# Altium PCB PCB_V0.PcbDoc (part 2 of 4)
Units mm, origin at the board's own origin, x right, y up, seen from the top; angles counter-clockwise.
Board outline 107.95 x 48.89 mm, 4 copper layers (Top Layer, Layer 1, Layer 2, Bottom Layer), stack 1.586 mm thick; 377 components, 276 nets, 880 pads, 284 vias.
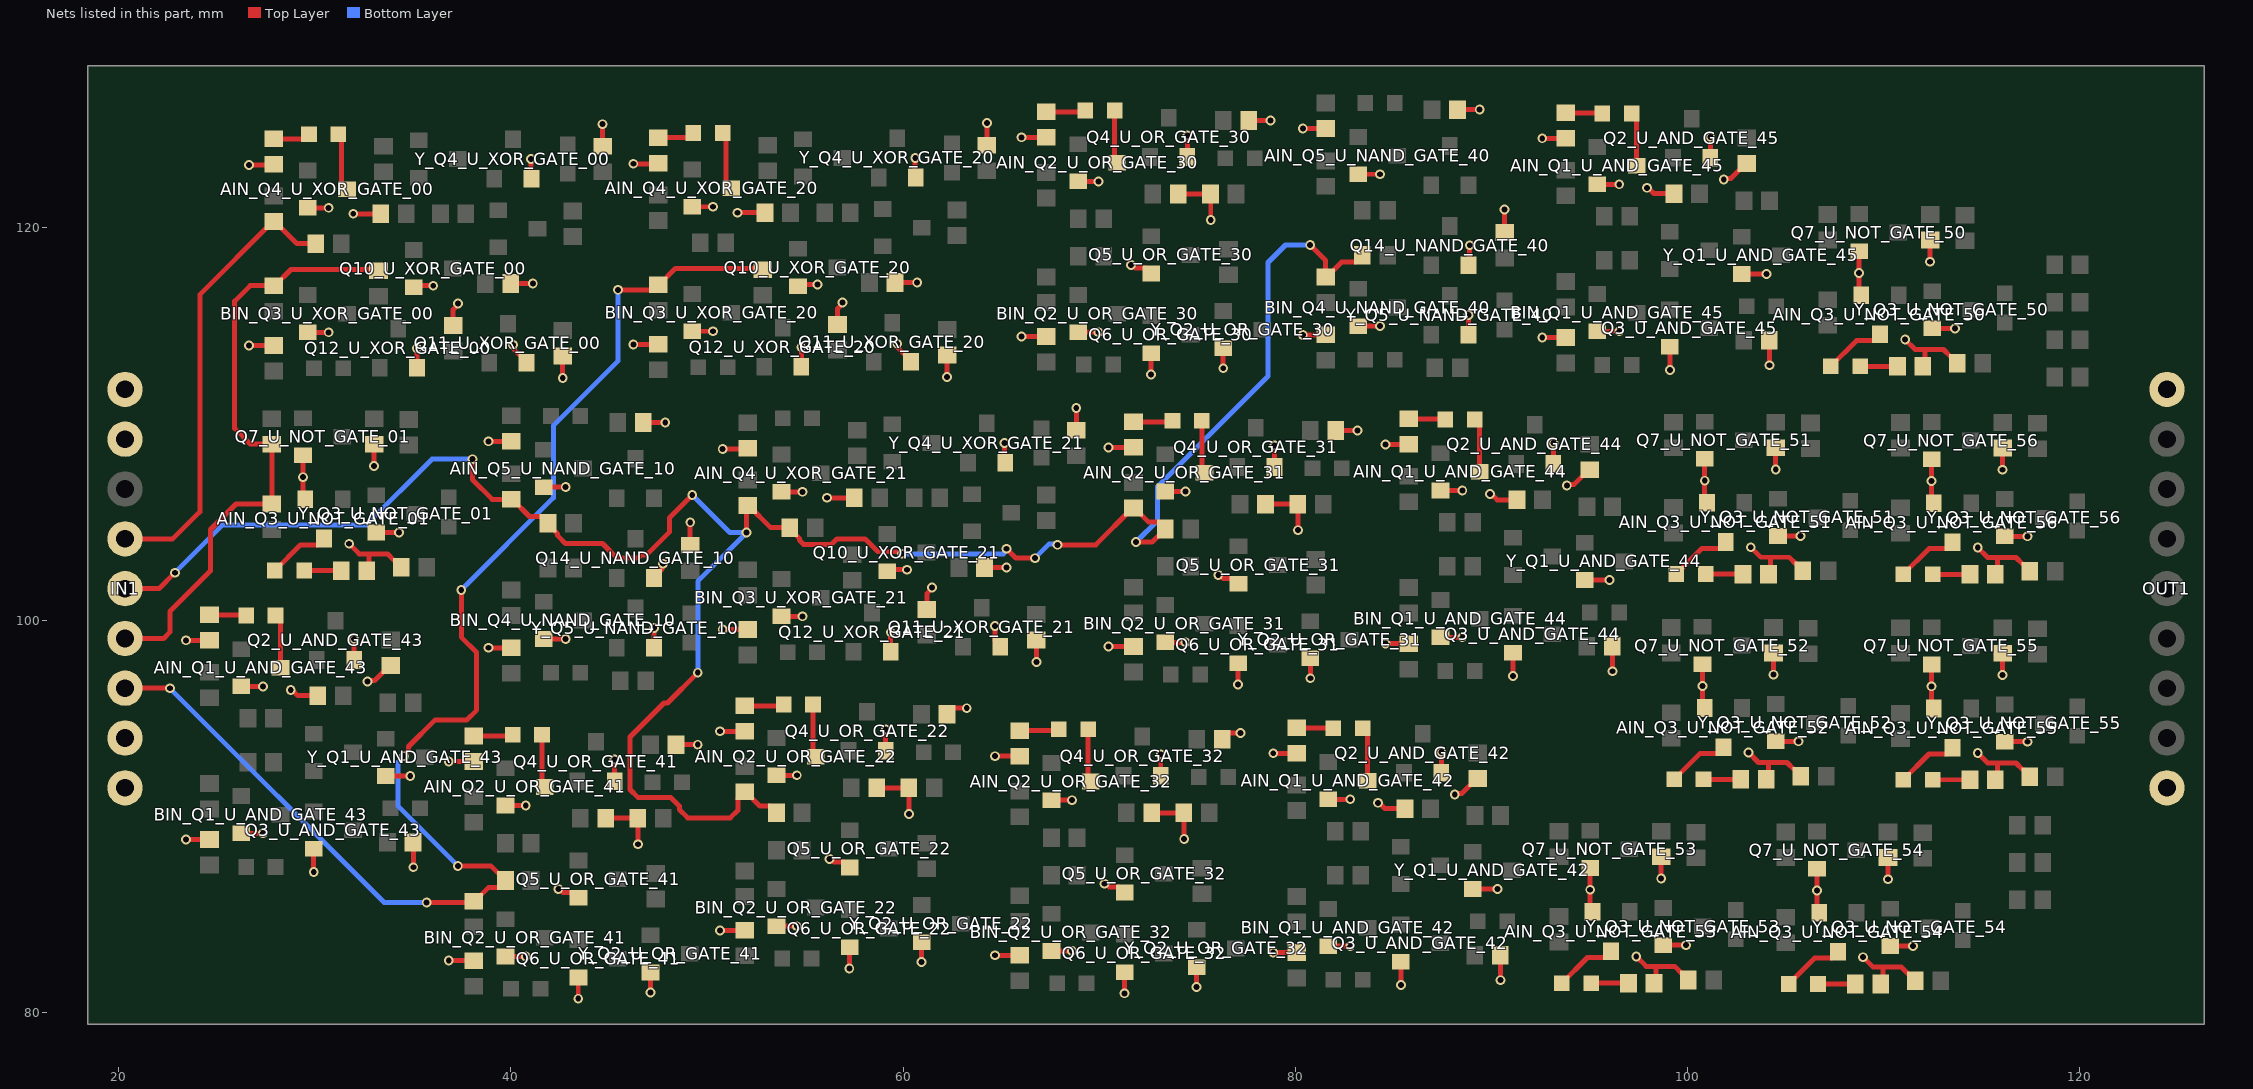
[diagram p4: the nets of this part, all layers, seen from the top]

## Components (designator, comment, footprint, x,y, rotation, side; value= is the part's Value field where it differs from the comment) (continued)
Y_RD3_U_NOT_GATE_01 "330 Ohms" "RES 0603_1608" 35.052,102.682 r0 top (schematic designator Y_RD3)
Y_RD3_U_NOT_GATE_50 "330 Ohms" "RES 0603_1608" 114.412,113.096 r0 top (schematic designator Y_RD3)
Y_RD3_U_NOT_GATE_51 "330 Ohms" "RES 0603_1608" 106.538,102.504 r0 top (schematic designator Y_RD3)
Y_RD3_U_NOT_GATE_52 "330 Ohms" "RES 0603_1608" 106.426,92.035 r0 top (schematic designator Y_RD3)
Y_RD3_U_NOT_GATE_53 "330 Ohms" "RES 0603_1608" 100.696,81.638 r0 top (schematic designator Y_RD3)
Y_RD3_U_NOT_GATE_54 "330 Ohms" "RES 0603_1608" 112.268,81.6 r0 top (schematic designator Y_RD3)
Y_RD3_U_NOT_GATE_55 "330 Ohms" "RES 0603_1608" 118.11,92.014 r0 top (schematic designator Y_RD3)
Y_RD3_U_NOT_GATE_56 "330 Ohms" "RES 0603_1608" 118.11,102.489 r0 top (schematic designator Y_RD3)
Y_RD4_U_XOR_GATE_00 "330 Ohms" "RES 0603_1608" 44.674,123.511 r270 top (schematic designator Y_RD4)
Y_RD4_U_XOR_GATE_20 "330 Ohms" "RES 0603_1608" 64.276,123.566 r270 top (schematic designator Y_RD4)
Y_RD4_U_XOR_GATE_21 "330 Ohms" "RES 0603_1608" 68.834,109.027 r270 top (schematic designator Y_RD4)
Y_RD5_U_NAND_GATE_10 "330 Ohms" "RES 0603_1608" 49.143,103.154 r270 top (schematic designator Y_RD5)
Y_RD5_U_NAND_GATE_40 "330 Ohms" "RES 0603_1608" 90.678,119.112 r270 top (schematic designator Y_RD5)

## Footprints (in the part's own frame and the unit in brackets; to place one, negate y for a bottom-side part, rotate by r counter-clockwise, add the part's x,y. Pads: shape width x height; smd on the part's side, far side on the other; paste and mask are expansions set on the pad)
2.54mm_TH_1x9_pin_header [mm]
  round 1.8 hole 0.9: 1(-7.62,0) 2(-5.08,0) 3(-2.54,0) 4(0,0) 5(2.54,0) 6(5.08,0) 7(7.62,0) 8(10.16,0) 9(12.7,0)
  silkscreen extent -8.89,-1.27 13.97,1.27, body extent -8.89,-1.25 13.97,1.25, height 8.6
"LED 0603_1608 BLUE" [mm] "Chip Diode, 2-Leads, Body 1.60x0.80mm, IPC Medium Density"
  rect 0.8x0.8 smd: 1(-0.75,0) 2(0.75,0)
  silkscreen extent -1.52,-0.7 1.52,0.7, body extent -0.8,-0.4 0.8,0.4, height 0.53
"LED 0603_1608 RED" [mm] "Chip Diode, 2-Leads, Body 1.60x0.80mm, IPC Medium Density"
  rect 0.8x0.8 smd: 1(-0.75,0) 2(0.75,0)
  silkscreen extent -1.52,-0.7 1.52,0.7, body extent -0.8,-0.4 0.8,0.4, height 0.53
"MCCSEMI SOT-23-3" [mm] "SOT23, 3-Leads, Body 2.92x2.37mm, Pitch 0.95mm, IPC Medium Density"
  rect 0.9x0.8 smd: 1(-1,0.95) 2(-1,-0.95) 3(1,0)
  silkscreen extent -0.7,-1.45 0.7,1.45, body extent -1.16,-1.45 1.16,1.45, height 1.5
"RES 0603_1608" [mm] "Chip Resistor, 2-Leads, Body 1.60x0.80mm, IPC Medium Density"
  rect 0.85x0.95 smd: 1(-0.65,0) 2(0.65,0)
  silkscreen extent -1.27,-0.7 1.27,0.7, body extent -0.8,-0.4 0.8,0.4, height 0.45

## Part data
AIN_D1_U_AND_GATE_42 AIN_D1_U_AND_GATE_43 AIN_D1_U_AND_GATE_44 AIN_D1_U_AND_GATE_45 AIN_D2_U_OR_GATE_22 AIN_D2_U_OR_GATE_30 AIN_D2_U_OR_GATE_31 AIN_D2_U_OR_GATE_32 AIN_D2_U_OR_GATE_41 AIN_D3_U_NOT_GATE_01 AIN_D3_U_NOT_GATE_50 AIN_D3_U_NOT_GATE_51 AIN_D3_U_NOT_GATE_52 AIN_D3_U_NOT_GATE_53 AIN_D3_U_NOT_GATE_54 AIN_D3_U_NOT_GATE_55 AIN_D3_U_NOT_GATE_56 AIN_D4_U_XOR_GATE_00 AIN_D4_U_XOR_GATE_20 AIN_D4_U_XOR_GATE_21 AIN_D5_U_NAND_GATE_10 AIN_D5_U_NAND_GATE_40 BIN_D1_U_AND_GATE_42 BIN_D1_U_AND_GATE_43 BIN_D1_U_AND_GATE_44 BIN_D1_U_AND_GATE_45 BIN_D2_U_OR_GATE_22 BIN_D2_U_OR_GATE_30 BIN_D2_U_OR_GATE_31 BIN_D2_U_OR_GATE_32 BIN_D2_U_OR_GATE_41 BIN_D3_U_XOR_GATE_00 BIN_D3_U_XOR_GATE_20 BIN_D3_U_XOR_GATE_21 BIN_D4_U_NAND_GATE_10 BIN_D4_U_NAND_GATE_40: library part IN-S63AT5B, "LED BLUE CLEAR 0603 SMD", Current - Test=5mA, Device Package="0603 (1608 Metric)", Lens Color=Clear, Manufacturer=Inolux, Millicandela Rating=45mcd, Supplier Device Package=0603, Supplier Part Number 1=1830-1061-1-ND, Voltage - Forward (Vf) (Typ)=2.8V, Color=Blue, ComponentLink1Description=Datasheet, ComponentLink1URL=http://www.inolux-corp.com/datasheet/SMDLED/Mono%20Color%20Top%20View/IN-S63AT%20Series_V1.1.pdf, ComponentLink2Description="DigiKey Link", ComponentLink2URL=https://www.digikey.com/en/products/detail/inolux/IN-S63AT5B/7604929, Configuration=Standard, Height (Max)=0.40mm, LastUpdated="6/3/2024 7:57:52 PM", Lens Size="1.15mm x 0.80mm", Lens Style="Rectangle with Flat Top", Lens Transparency=Clear, Lifecycle Status=Active, Minimum Order=1, Mounting Type="Surface Mount", Package / Case="0603 (1608 Metric)", Packaging=TapeAndReel, PartId=834, Part Number=IN-S63AT5B, Part Status=Active, Price=0.03, Series=IN-S63AT, Size / Dimension="1.60mm L x 0.80mm W", Supplier 1=DigiKey, Viewing Angle=120°, Wavelength - Dominant=470nm, Wavelength - Peak=468nm
AIN_Q1_U_AND_GATE_42 AIN_Q1_U_AND_GATE_43 AIN_Q1_U_AND_GATE_44 AIN_Q1_U_AND_GATE_45 AIN_Q2_U_OR_GATE_22 AIN_Q2_U_OR_GATE_30 AIN_Q2_U_OR_GATE_31 AIN_Q2_U_OR_GATE_32 AIN_Q2_U_OR_GATE_41 AIN_Q3_U_NOT_GATE_01 AIN_Q3_U_NOT_GATE_50 AIN_Q3_U_NOT_GATE_51 AIN_Q3_U_NOT_GATE_52 AIN_Q3_U_NOT_GATE_53 AIN_Q3_U_NOT_GATE_54 AIN_Q3_U_NOT_GATE_55 AIN_Q3_U_NOT_GATE_56 AIN_Q4_U_XOR_GATE_00 AIN_Q4_U_XOR_GATE_20 AIN_Q4_U_XOR_GATE_21 AIN_Q5_U_NAND_GATE_10 AIN_Q5_U_NAND_GATE_40 BIN_Q1_U_AND_GATE_42 BIN_Q1_U_AND_GATE_43 BIN_Q1_U_AND_GATE_44 BIN_Q1_U_AND_GATE_45 BIN_Q2_U_OR_GATE_22 BIN_Q2_U_OR_GATE_30 BIN_Q2_U_OR_GATE_31 BIN_Q2_U_OR_GATE_32 BIN_Q2_U_OR_GATE_41 BIN_Q3_U_XOR_GATE_00 BIN_Q3_U_XOR_GATE_20 BIN_Q3_U_XOR_GATE_21 BIN_Q4_U_NAND_GATE_10 BIN_Q4_U_NAND_GATE_40 Q1_U_AND_GATE_42 Q1_U_AND_GATE_43 Q1_U_AND_GATE_44 Q1_U_AND_GATE_45 Q2_U_AND_GATE_42 Q2_U_AND_GATE_43 Q2_U_AND_GATE_44 Q2_U_AND_GATE_45 Q3_U_AND_GATE_42 Q3_U_AND_GATE_43 Q3_U_AND_GATE_44 Q3_U_AND_GATE_45 Q4_U_OR_GATE_22 Q4_U_OR_GATE_30 Q4_U_OR_GATE_31 Q4_U_OR_GATE_32 Q4_U_OR_GATE_41 Q5_U_OR_GATE_22 Q5_U_OR_GATE_30 Q5_U_OR_GATE_31 Q5_U_OR_GATE_32 Q5_U_OR_GATE_41 Q6_U_OR_GATE_22 Q6_U_OR_GATE_30 Q6_U_OR_GATE_31 Q6_U_OR_GATE_32 Q6_U_OR_GATE_41 Q7_U_NOT_GATE_01 Q7_U_NOT_GATE_50 Q7_U_NOT_GATE_51 Q7_U_NOT_GATE_52 Q7_U_NOT_GATE_53 Q7_U_NOT_GATE_54 Q7_U_NOT_GATE_55 Q7_U_NOT_GATE_56 Q8_U_XOR_GATE_00 Q8_U_XOR_GATE_20 Q8_U_XOR_GATE_21 Q9_U_XOR_GATE_00 Q9_U_XOR_GATE_20 Q9_U_XOR_GATE_21 Q10_U_XOR_GATE_00 Q10_U_XOR_GATE_20 Q10_U_XOR_GATE_21 Q11_U_XOR_GATE_00 Q11_U_XOR_GATE_20 Q11_U_XOR_GATE_21 Q12_U_XOR_GATE_00 Q12_U_XOR_GATE_20 Q12_U_XOR_GATE_21 Q13_U_NAND_GATE_10 Q13_U_NAND_GATE_40 Q14_U_NAND_GATE_10 Q14_U_NAND_GATE_40 Y_Q1_U_AND_GATE_42 Y_Q1_U_AND_GATE_43 Y_Q1_U_AND_GATE_44 Y_Q1_U_AND_GATE_45 Y_Q2_U_OR_GATE_22 Y_Q2_U_OR_GATE_30 Y_Q2_U_OR_GATE_31 Y_Q2_U_OR_GATE_32 Y_Q2_U_OR_GATE_41 Y_Q3_U_NOT_GATE_01 Y_Q3_U_NOT_GATE_50 Y_Q3_U_NOT_GATE_51 Y_Q3_U_NOT_GATE_52 Y_Q3_U_NOT_GATE_53 Y_Q3_U_NOT_GATE_54 Y_Q3_U_NOT_GATE_55 Y_Q3_U_NOT_GATE_56 Y_Q4_U_XOR_GATE_00 Y_Q4_U_XOR_GATE_20 Y_Q4_U_XOR_GATE_21 Y_Q5_U_NAND_GATE_10 Y_Q5_U_NAND_GATE_40: library part MMSS8050-L-TP, "TRANS NPN 25V 1.5A SOT23", Current - Collector (Ic) (Max)="1.5 A", Current - Collector Cutoff (Max)=100nA, DC Current Gain (hFE) (Min) @ Ic, Vce="120 @ 100mA, 1V", Frequency - Transition=100MHz, Manufacturer="Micro Commercial Co", Operating Temperature="-55°C ~ 150°C (TJ)", Package / Case="TO-236-3, SC-59, SOT-23-3", Power - Max="625 mW", Supplier Device Package=SOT-23, Supplier Part Number 1=MMSS8050-L-TPMSCT-ND, Voltage - Collector Emitter Breakdown (Max)="25 V", ComponentLink1Description=Datasheet, ComponentLink1URL=https://www.mccsemi.com/pdf/Products/MMSS8050(SOT-23).pdf, ComponentLink2Description="DigiKey Link", ComponentLink2URL=https://www.digikey.com/en/products/detail/micro-commercial-co/MMSS8050-L-TP/2827197, LastUpdated="6/3/2024 8:24:16 PM", Lifecycle Status=Active, Minimum Order=1, Mounting Type="Surface Mount", Packaging=TapeAndReel, PartId=278, Part Number=MMSS8050-L-TP, Part Status=Active, Price=0.01, Series=-, Supplier 1=DigiKey, Transistor Type=NPN, Vce Saturation (Max) @ Ib, Ic="500mV @ 80mA, 800mA"
AIN_R1_U_AND_GATE_42 AIN_R1_U_AND_GATE_43 AIN_R1_U_AND_GATE_44 AIN_R1_U_AND_GATE_45 AIN_R2_U_OR_GATE_22 AIN_R2_U_OR_GATE_30 AIN_R2_U_OR_GATE_31 AIN_R2_U_OR_GATE_32 AIN_R2_U_OR_GATE_41 AIN_R3_U_NOT_GATE_01 AIN_R3_U_NOT_GATE_50 AIN_R3_U_NOT_GATE_51 AIN_R3_U_NOT_GATE_52 AIN_R3_U_NOT_GATE_53 AIN_R3_U_NOT_GATE_54 AIN_R3_U_NOT_GATE_55 AIN_R3_U_NOT_GATE_56 AIN_R4_U_XOR_GATE_00 AIN_R4_U_XOR_GATE_20 AIN_R4_U_XOR_GATE_21 AIN_R5_U_NAND_GATE_10 AIN_R5_U_NAND_GATE_40 BIN_R1_U_AND_GATE_42 BIN_R1_U_AND_GATE_43 BIN_R1_U_AND_GATE_44 BIN_R1_U_AND_GATE_45 BIN_R2_U_OR_GATE_22 BIN_R2_U_OR_GATE_30 BIN_R2_U_OR_GATE_31 BIN_R2_U_OR_GATE_32 BIN_R2_U_OR_GATE_41 BIN_R3_U_XOR_GATE_00 BIN_R3_U_XOR_GATE_20 BIN_R3_U_XOR_GATE_21 BIN_R4_U_NAND_GATE_10 BIN_R4_U_NAND_GATE_40 R1_U_AND_GATE_42 R1_U_AND_GATE_43 R1_U_AND_GATE_44 R1_U_AND_GATE_45 R2_U_AND_GATE_42 R2_U_AND_GATE_43 R2_U_AND_GATE_44 R2_U_AND_GATE_45 R3_U_AND_GATE_42 R3_U_AND_GATE_43 R3_U_AND_GATE_44 R3_U_AND_GATE_45 R11_U_OR_GATE_22 R11_U_OR_GATE_30 R11_U_OR_GATE_31 R11_U_OR_GATE_32 R11_U_OR_GATE_41 R12_U_OR_GATE_22 R12_U_OR_GATE_30 R12_U_OR_GATE_31 R12_U_OR_GATE_32 R12_U_OR_GATE_41 R13_U_OR_GATE_22 R13_U_OR_GATE_30 R13_U_OR_GATE_31 R13_U_OR_GATE_32 R13_U_OR_GATE_41 R14_U_NOT_GATE_01 R14_U_NOT_GATE_50 R14_U_NOT_GATE_51 R14_U_NOT_GATE_52 R14_U_NOT_GATE_53 R14_U_NOT_GATE_54 R14_U_NOT_GATE_55 R14_U_NOT_GATE_56 R15_U_XOR_GATE_00 R15_U_XOR_GATE_20 R15_U_XOR_GATE_21 R17_U_XOR_GATE_00 R17_U_XOR_GATE_20 R17_U_XOR_GATE_21 R18_U_XOR_GATE_00 R18_U_XOR_GATE_20 R18_U_XOR_GATE_21 R19_U_XOR_GATE_00 R19_U_XOR_GATE_20 R19_U_XOR_GATE_21 R20_U_XOR_GATE_00 R20_U_XOR_GATE_20 R20_U_XOR_GATE_21 R21_U_XOR_GATE_00 R21_U_XOR_GATE_20 R21_U_XOR_GATE_21 R22_U_XOR_GATE_00 R22_U_XOR_GATE_20 R22_U_XOR_GATE_21 R23_U_NAND_GATE_10 R23_U_NAND_GATE_40 R24_U_NAND_GATE_10 R24_U_NAND_GATE_40 Y_R1_U_AND_GATE_42 Y_R1_U_AND_GATE_43 Y_R1_U_AND_GATE_44 Y_R1_U_AND_GATE_45 Y_R2_U_OR_GATE_22 Y_R2_U_OR_GATE_30 Y_R2_U_OR_GATE_31 Y_R2_U_OR_GATE_32 Y_R2_U_OR_GATE_41 Y_R3_U_NOT_GATE_01 Y_R3_U_NOT_GATE_50 Y_R3_U_NOT_GATE_51 Y_R3_U_NOT_GATE_52 Y_R3_U_NOT_GATE_53 Y_R3_U_NOT_GATE_54 Y_R3_U_NOT_GATE_55 Y_R3_U_NOT_GATE_56 Y_R4_U_XOR_GATE_00 Y_R4_U_XOR_GATE_20 Y_R4_U_XOR_GATE_21 Y_R5_U_NAND_GATE_10 Y_R5_U_NAND_GATE_40: library part CPF0603B1K0E, "RES SMD 1K OHM 0.1% 1/16W 0603", Device Package="0603 (1608 Metric)", Manufacturer="TE Connectivity Passive Product", Operating Temperature="-55°C ~ 155°C", Power (Watts)="0.063W, 1/16W", Supplier Device Package=0603, Supplier Part Number 1=A119887CT-ND, Temperature Coefficient=±25ppm/°C, Tolerance=±0.1%, ComponentLink1Description=Datasheet, ComponentLink1URL=https://www.te.com/commerce/DocumentDelivery/DDEController?Action=srchrtrv&DocNm=1773200&DocType=DS&DocLang=English, ComponentLink2Description="DigiKey Link", ComponentLink2URL=https://www.digikey.com/en/products/detail/te-connectivity-passive-product/CPF0603B1K0E/2390473, Composition="Thin Film", Height - Seated (Max)="0.022\" (0.55mm)", LastUpdated="2/9/2024 8:43:37 PM", Lifecycle Status=Active, Minimum Order=1, Number of Terminations=2, Package / Case="0603 (1608 Metric)", Packaging=TapeAndReel, PartId=4877, Part Number=CPF0603B1K0E, Part Status=Active, Price=0.09, Resistance="1 kOhms", Series="CPF, Neohm", Size / Dimension="0.061\" L x 0.031\" W (1.55mm x 0.80mm)", Supplier 1=DigiKey
AIN_RD1_U_AND_GATE_42 AIN_RD1_U_AND_GATE_43 AIN_RD1_U_AND_GATE_44 AIN_RD1_U_AND_GATE_45 AIN_RD2_U_OR_GATE_22 AIN_RD2_U_OR_GATE_30 AIN_RD2_U_OR_GATE_31 AIN_RD2_U_OR_GATE_32 AIN_RD2_U_OR_GATE_41 AIN_RD3_U_NOT_GATE_01 AIN_RD3_U_NOT_GATE_50 AIN_RD3_U_NOT_GATE_51 AIN_RD3_U_NOT_GATE_52 AIN_RD3_U_NOT_GATE_53 AIN_RD3_U_NOT_GATE_54 AIN_RD3_U_NOT_GATE_55 AIN_RD3_U_NOT_GATE_56 AIN_RD4_U_XOR_GATE_00 AIN_RD4_U_XOR_GATE_20 AIN_RD4_U_XOR_GATE_21 AIN_RD5_U_NAND_GATE_10 AIN_RD5_U_NAND_GATE_40 BIN_RD1_U_AND_GATE_42 BIN_RD1_U_AND_GATE_43 BIN_RD1_U_AND_GATE_44 BIN_RD1_U_AND_GATE_45 BIN_RD2_U_OR_GATE_22 BIN_RD2_U_OR_GATE_30 BIN_RD2_U_OR_GATE_31 BIN_RD2_U_OR_GATE_32 BIN_RD2_U_OR_GATE_41 BIN_RD3_U_XOR_GATE_00 BIN_RD3_U_XOR_GATE_20 BIN_RD3_U_XOR_GATE_21 BIN_RD4_U_NAND_GATE_10 BIN_RD4_U_NAND_GATE_40 Y_RD1_U_AND_GATE_42 Y_RD1_U_AND_GATE_43 Y_RD1_U_AND_GATE_44 Y_RD1_U_AND_GATE_45 Y_RD2_U_OR_GATE_22 Y_RD2_U_OR_GATE_30 Y_RD2_U_OR_GATE_31 Y_RD2_U_OR_GATE_32 Y_RD2_U_OR_GATE_41 Y_RD3_U_NOT_GATE_01 Y_RD3_U_NOT_GATE_50 Y_RD3_U_NOT_GATE_51 Y_RD3_U_NOT_GATE_52 Y_RD3_U_NOT_GATE_53 Y_RD3_U_NOT_GATE_54 Y_RD3_U_NOT_GATE_55 Y_RD3_U_NOT_GATE_56 Y_RD4_U_XOR_GATE_00 Y_RD4_U_XOR_GATE_20 Y_RD4_U_XOR_GATE_21 Y_RD5_U_NAND_GATE_10 Y_RD5_U_NAND_GATE_40: library part RMCF0603JT330R, "RES 330 OHM 5% 1/10W 0603", Device Package="0603 (1608 Metric)", Manufacturer="Stackpole Electronics Inc", Operating Temperature="-55°C ~ 155°C", Power (Watts)="0.1W, 1/10W", Ratings=AEC-Q200, Supplier Device Package=0603, Supplier Part Number 1=RMCF0603JT330RCT-ND, Temperature Coefficient=±200ppm/°C, Tolerance=±5%, ComponentLink1Description=Datasheet, ComponentLink1URL=https://www.seielect.com/catalog/sei-rmcf_rmcp.pdf, ComponentLink2Description="DigiKey Link", ComponentLink2URL=https://www.digikey.com/en/products/detail/stackpole-electronics-inc/RMCF0603JT330R/1757998, Composition="Thick Film", Features="Automotive AEC-Q200", Height - Seated (Max)="0.022\" (0.55mm)", LastUpdated="2/9/2024 8:43:33 PM", Lifecycle Status=Active, Minimum Order=1, Number of Terminations=2, Package / Case="0603 (1608 Metric)", Packaging=CutTape, PartId=5841, Part Number=RMCF0603JT330R, Part Status=Active, Price=0.01, Resistance="330 Ohms", Series=RMCF, Size / Dimension="0.061\" L x 0.031\" W (1.55mm x 0.80mm)", Supplier 1=DigiKey
R4 R5 R6 R7 R8 R9 R10 R16_U_XOR_GATE_00 R16_U_XOR_GATE_20 R16_U_XOR_GATE_21 RO1_U_AND_GATE_42 RO1_U_AND_GATE_43 RO1_U_AND_GATE_44 RO1_U_AND_GATE_45 RO2_U_OR_GATE_22 RO2_U_OR_GATE_30 RO2_U_OR_GATE_31 RO2_U_OR_GATE_32 RO2_U_OR_GATE_41 RO3_U_NOT_GATE_01 RO3_U_NOT_GATE_50 RO3_U_NOT_GATE_51 RO3_U_NOT_GATE_52 RO3_U_NOT_GATE_53 RO3_U_NOT_GATE_54 RO3_U_NOT_GATE_55 RO3_U_NOT_GATE_56 RO4_U_NAND_GATE_10 RO4_U_NAND_GATE_40: library part ERA-3AED221V, "RES SMD 220 OHM 0.5% 1/10W 0603", Device Package="0603 (1608 Metric)", Manufacturer="Panasonic Electronic Components", Operating Temperature="-55°C ~ 155°C", Power (Watts)="0.1W, 1/10W", Ratings=AEC-Q200, Supplier Device Package=0603, Supplier Part Number 1=P123752CT-ND, Temperature Coefficient=±25ppm/°C, Tolerance=±0.5%, ComponentLink1Description=Datasheet, ComponentLink1URL=https://industrial.panasonic.com/cdbs/www-data/pdf/RDM0000/AOA0000C307.pdf, ComponentLink2Description="DigiKey Link", ComponentLink2URL=https://www.digikey.com/en/products/detail/panasonic-electronic-components/ERA-3AED221V/9373509, Composition="Thin Film", Features="Automotive AEC-Q200", Height - Seated (Max)="0.022\" (0.55mm)", LastUpdated="2/9/2024 8:43:36 PM", Lifecycle Status=Active, Minimum Order=1, Number of Terminations=2, Package / Case="0603 (1608 Metric)", Packaging=TapeAndReel, PartId=4952, Part Number=ERA-3AED221V, Part Status=Active, Price=0.03, Resistance="220 Ohms", Series=ERA-3A, Size / Dimension="0.063\" L x 0.031\" W (1.60mm x 0.80mm)", Supplier 1=DigiKey
Y_D1_U_AND_GATE_42 Y_D1_U_AND_GATE_43 Y_D1_U_AND_GATE_44 Y_D1_U_AND_GATE_45 Y_D2_U_OR_GATE_22 Y_D2_U_OR_GATE_30 Y_D2_U_OR_GATE_31 Y_D2_U_OR_GATE_32 Y_D2_U_OR_GATE_41 Y_D3_U_NOT_GATE_01 Y_D3_U_NOT_GATE_50 Y_D3_U_NOT_GATE_51 Y_D3_U_NOT_GATE_52 Y_D3_U_NOT_GATE_53 Y_D3_U_NOT_GATE_54 Y_D3_U_NOT_GATE_55 Y_D3_U_NOT_GATE_56 Y_D4_U_XOR_GATE_00 Y_D4_U_XOR_GATE_20 Y_D4_U_XOR_GATE_21 Y_D5_U_NAND_GATE_10 Y_D5_U_NAND_GATE_40: library part XZMDK53W-8, "LED RED CLEAR CHIP SMD", Current - Test=20mA, Device Package="0603 (1608 Metric)", Lens Color=Colorless, Manufacturer=SunLED, Millicandela Rating=248mcd, Supplier Device Package="Chip LED", Supplier Part Number 1=1497-1169-6-ND, Voltage - Forward (Vf) (Typ)=1.95V, Color=Red, ComponentLink1Description=Datasheet, ComponentLink1URL=https://www.sunledusa.com/products/spec/XZMDK53W-8.pdf, ComponentLink2Description="DigiKey Link", ComponentLink2URL=https://www.digikey.com/en/products/detail/sunled/XZMDK53W-8/4745952, Configuration=Standard, Height (Max)=0.95mm, LastUpdated="6/3/2024 7:59:48 PM", Lens Size="0.35mm Dia", Lens Style="Round with Domed Top", Lens Transparency=Clear, Lifecycle Status=Active, Minimum Order=1, Mounting Type="Surface Mount", Package / Case="0603 (1608 Metric)", Packaging=TapeAndReel, PartId=401, Part Number=XZMDK53W-8, Part Status=Active, Price=0.06, Series=PixsoLED, Size / Dimension="1.60mm L x 0.80mm W", Supplier 1=DigiKey, Viewing Angle=60°, Wavelength - Dominant=630nm, Wavelength - Peak=645nm

## Via types
v1: diameter 0.5, hole 0.3, Top Layer to Bottom Layer, 284 vias

## Nets (pads, with @x,y where several pads share a name; then routed paths per layer and width w, separated by ;. In a path a pad name is that pad's centre, name@x,y a point inside that pad or via, vN(x,y) a via of type N, cw(c..) or ccw(c..) an arc to the next point about the centre after c; other vN are vias at no path point)
+5: AIN_RD1_U_AND_GATE_42.1 AIN_RD1_U_AND_GATE_43.1 AIN_RD1_U_AND_GATE_44.1 AIN_RD1_U_AND_GATE_45.1 AIN_RD2_U_OR_GATE_22.1 AIN_RD2_U_OR_GATE_30.1 AIN_RD2_U_OR_GATE_31.1 AIN_RD2_U_OR_GATE_32.1 AIN_RD2_U_OR_GATE_41.1 AIN_RD3_U_NOT_GATE_01.1 AIN_RD3_U_NOT_GATE_50.1 AIN_RD3_U_NOT_GATE_51.1 AIN_RD3_U_NOT_GATE_52.1 AIN_RD3_U_NOT_GATE_53.1 AIN_RD3_U_NOT_GATE_54.1 AIN_RD3_U_NOT_GATE_55.1 AIN_RD3_U_NOT_GATE_56.1 AIN_RD4_U_XOR_GATE_00.1 AIN_RD4_U_XOR_GATE_20.1 AIN_RD4_U_XOR_GATE_21.1 AIN_RD5_U_NAND_GATE_10.1 AIN_RD5_U_NAND_GATE_40.1 BIN_RD1_U_AND_GATE_42.1 BIN_RD1_U_AND_GATE_43.1 BIN_RD1_U_AND_GATE_44.1 BIN_RD1_U_AND_GATE_45.1 BIN_RD2_U_OR_GATE_22.1 BIN_RD2_U_OR_GATE_30.1 BIN_RD2_U_OR_GATE_31.1 BIN_RD2_U_OR_GATE_32.1 BIN_RD2_U_OR_GATE_41.1 BIN_RD3_U_XOR_GATE_00.1 BIN_RD3_U_XOR_GATE_20.1 BIN_RD3_U_XOR_GATE_21.1 BIN_RD4_U_NAND_GATE_10.1 BIN_RD4_U_NAND_GATE_40.1 IN1.1 IN1.2 OUT1.1 R1_U_AND_GATE_42.2 R1_U_AND_GATE_43.2 R1_U_AND_GATE_44.2 R1_U_AND_GATE_45.2 R12_U_OR_GATE_22.2 R12_U_OR_GATE_30.2 R12_U_OR_GATE_31.2 R12_U_OR_GATE_32.2 R12_U_OR_GATE_41.2 R15_U_XOR_GATE_00.2 R15_U_XOR_GATE_20.2 R15_U_XOR_GATE_21.2 R16_U_XOR_GATE_00.2 R16_U_XOR_GATE_20.2 R16_U_XOR_GATE_21.2 R19_U_XOR_GATE_00.2 R19_U_XOR_GATE_20.2 R19_U_XOR_GATE_21.2 R20_U_XOR_GATE_00.2 R20_U_XOR_GATE_20.2 R20_U_XOR_GATE_21.2 RO1_U_AND_GATE_42.2 RO1_U_AND_GATE_43.2 RO1_U_AND_GATE_44.2 RO1_U_AND_GATE_45.2 RO2_U_OR_GATE_22.2 RO2_U_OR_GATE_30.2 RO2_U_OR_GATE_31.2 RO2_U_OR_GATE_32.2 RO2_U_OR_GATE_41.2 RO3_U_NOT_GATE_01.2 RO3_U_NOT_GATE_50.2 RO3_U_NOT_GATE_51.2 RO3_U_NOT_GATE_52.2 RO3_U_NOT_GATE_53.2 RO3_U_NOT_GATE_54.2 RO3_U_NOT_GATE_55.2 RO3_U_NOT_GATE_56.2 RO4_U_NAND_GATE_10.2 RO4_U_NAND_GATE_40.2 Y_RD1_U_AND_GATE_42.1 Y_RD1_U_AND_GATE_43.1 Y_RD1_U_AND_GATE_44.1 Y_RD1_U_AND_GATE_45.1 Y_RD2_U_OR_GATE_22.1 Y_RD2_U_OR_GATE_30.1 Y_RD2_U_OR_GATE_31.1 Y_RD2_U_OR_GATE_32.1 Y_RD2_U_OR_GATE_41.1 Y_RD3_U_NOT_GATE_01.1 Y_RD3_U_NOT_GATE_50.1 Y_RD3_U_NOT_GATE_51.1 Y_RD3_U_NOT_GATE_52.1 Y_RD3_U_NOT_GATE_53.1 Y_RD3_U_NOT_GATE_54.1 Y_RD3_U_NOT_GATE_55.1 Y_RD3_U_NOT_GATE_56.1 Y_RD4_U_XOR_GATE_00.1 Y_RD4_U_XOR_GATE_20.1 Y_RD4_U_XOR_GATE_21.1 Y_RD5_U_NAND_GATE_10.1 Y_RD5_U_NAND_GATE_40.1 | length 136.4
  Top Layer w0.254: v1(23.434,88.803) BIN_RD1_U_AND_GATE_43.1@24.627,88.803 ; v1(23.434,98.963) AIN_RD1_U_AND_GATE_43.1@24.627,98.963 ; v1(26.64,114.001) BIN_RD3_U_XOR_GATE_00.1@27.91,114.001 ; v1(26.64,123.212) 27.88,123.212 AIN_RD4_U_XOR_GATE_00.1@27.91,123.242 ; v1(28.768,96.437) 28.835,96.437 29.133,96.139 R1_U_AND_GATE_43.2@30.15,96.139 ; v1(31.75,103.886) 32.258,103.378 32.766,103.378 ; v1(31.958,120.717) R19_U_XOR_GATE_00.2@33.356,120.717 ; AIN_RD3_U_NOT_GATE_01.1@32.654,102.52 32.766,102.632 32.766,103.378 ; v1(32.69,96.865) 32.737,96.912 33.048,96.912 33.814,97.678 RO1_U_AND_GATE_43.2@33.864,97.678 ; v1(33.02,107.859) RO3_U_NOT_GATE_01.2@33.02,108.966 ; Y_RD3_U_NOT_GATE_01.1@34.402,102.682 34.402,102.732 34.104,103.03 34.054,103.03 33.706,103.378 32.766,103.378 ; Y_RD1_U_AND_GATE_43.1@35.006,88.661 35.022,88.645 v1(35.022,87.391) ; v1(36.83,82.627) BIN_RD2_U_OR_GATE_41.1@38.1,82.627 ; v1(36.83,92.782) AIN_RD2_U_OR_GATE_41.1@38.1,92.782 ; R15_U_XOR_GATE_00.2@37.054,115.017 37.054,115.824 37.308,116.078 v1(37.308,116.145) ; v1(38.853,98.583) 40.019,98.583 BIN_RD4_U_NAND_GATE_10.1@40.02,98.582 ; v1(38.853,109.112) AIN_RD5_U_NAND_GATE_10.1@40.02,109.112 ; R20_U_XOR_GATE_00.2@39.99,117.161 v1(41.118,117.161) ; v1(42.642,112.335) R16_U_XOR_GATE_00.2@42.642,113.463 ; Y_RD4_U_XOR_GATE_00.1@44.674,124.161 v1(44.674,125.289) ; R12_U_OR_GATE_41.2@44.83,89.892 RO2_U_OR_GATE_41.2@46.468,89.892 46.482,89.878 v1(46.482,88.561) ; v1(46.242,114.056) BIN_RD3_U_XOR_GATE_20.1@47.512,114.056 ; v1(46.242,123.267) 47.482,123.267 AIN_RD4_U_XOR_GATE_20.1@47.512,123.297 ; RO4_U_NAND_GATE_10.2@46.745,110.073 v1(47.873,110.073) ; Y_RD2_U_OR_GATE_41.1@48.418,93.641 v1(49.53,93.641) ; Y_RD5_U_NAND_GATE_10.1@49.143,103.804 v1(49.143,104.982) ; v1(50.656,84.17) BIN_RD2_U_OR_GATE_22.1@51.926,84.17 ; v1(50.656,94.325) AIN_RD2_U_OR_GATE_22.1@51.926,94.325 ; v1(50.8,99.517) BIN_RD3_U_XOR_GATE_21.1@52.07,99.517 ; v1(50.8,108.728) 52.04,108.728 AIN_RD4_U_XOR_GATE_21.1@52.07,108.758 ; v1(51.56,120.772) R19_U_XOR_GATE_20.2@52.958,120.772 ; v1(56.118,106.233) R19_U_XOR_GATE_21.2@57.516,106.233 ; R15_U_XOR_GATE_20.2@56.656,115.072 56.656,115.879 56.91,116.133 v1(56.91,116.2) ; R12_U_OR_GATE_22.2@58.656,91.435 RO2_U_OR_GATE_22.2@60.294,91.435 60.308,91.421 v1(60.308,90.104) ; R20_U_XOR_GATE_20.2@59.592,117.216 v1(60.72,117.216) ; R15_U_XOR_GATE_21.2@61.214,100.533 61.214,101.34 61.468,101.594 v1(61.468,101.661) ; Y_RD2_U_OR_GATE_22.1@62.244,95.184 62.244,95.206 62.542,95.504 v1(63.246,95.504) ; v1(62.244,112.39) R16_U_XOR_GATE_20.2@62.244,113.518 ; R20_U_XOR_GATE_21.2@64.15,102.677 v1(65.278,102.677) ; Y_RD4_U_XOR_GATE_20.1@64.276,124.216 v1(64.276,125.344) ; v1(64.684,82.9) BIN_RD2_U_OR_GATE_32.1@65.954,82.9 ; v1(64.684,93.055) AIN_RD2_U_OR_GATE_32.1@65.954,93.055 ; v1(66.04,114.462) BIN_RD2_U_OR_GATE_30.1@67.31,114.462 ; v1(66.04,124.617) AIN_RD2_U_OR_GATE_30.1@67.31,124.617 ; v1(66.802,97.851) R16_U_XOR_GATE_21.2@66.802,98.979 ; Y_RD4_U_XOR_GATE_21.1@68.834,109.677 v1(68.834,110.805) ; v1(70.484,98.648) BIN_RD2_U_OR_GATE_31.1@71.754,98.648 ; v1(70.484,108.803) AIN_RD2_U_OR_GATE_31.1@71.754,108.803 ; R12_U_OR_GATE_32.2@72.684,90.165 RO2_U_OR_GATE_32.2@74.322,90.165 74.336,90.151 v1(74.336,88.834) ; R12_U_OR_GATE_30.2@74.04,121.727 RO2_U_OR_GATE_30.2@75.678,121.727 75.692,121.713 v1(75.692,120.396) ; Y_RD2_U_OR_GATE_32.1@76.272,93.914 76.272,93.936 76.57,94.234 v1(77.216,94.234) ; Y_RD2_U_OR_GATE_30.1@77.628,125.476 v1(78.74,125.476) ; R12_U_OR_GATE_31.2@78.484,105.913 RO2_U_OR_GATE_31.2@80.122,105.913 80.136,105.899 v1(80.136,104.582) ; v1(78.882,83.042) BIN_RD1_U_AND_GATE_42.1@80.075,83.042 ; v1(78.882,93.202) AIN_RD1_U_AND_GATE_42.1@80.075,93.202 ; v1(80.388,114.541) 81.554,114.541 BIN_RD4_U_NAND_GATE_40.1@81.555,114.54 ; v1(80.388,125.07) AIN_RD5_U_NAND_GATE_40.1@81.555,125.07 ; Y_RD2_U_OR_GATE_31.1@82.072,109.662 v1(83.184,109.662) ; v1(84.216,90.676) 84.283,90.676 84.581,90.378 R1_U_AND_GATE_42.2@85.598,90.378 ; v1(84.598,98.796) BIN_RD1_U_AND_GATE_44.1@85.791,98.796 ; v1(84.598,108.956) AIN_RD1_U_AND_GATE_44.1@85.791,108.956 ; v1(88.138,91.104) 88.185,91.151 88.496,91.151 89.262,91.917 RO1_U_AND_GATE_42.2@89.312,91.917 ; RO4_U_NAND_GATE_40.2@88.28,126.031 v1(89.408,126.031) ; v1(89.932,106.43) 89.999,106.43 90.297,106.132 R1_U_AND_GATE_44.2@91.314,106.132 ; Y_RD1_U_AND_GATE_42.1@90.454,82.9 90.47,82.884 v1(90.47,81.63) ; Y_RD5_U_NAND_GATE_40.1@90.678,119.762 v1(90.678,120.94) ; v1(92.602,114.407) BIN_RD1_U_AND_GATE_45.1@93.795,114.407 ; v1(92.602,124.567) AIN_RD1_U_AND_GATE_45.1@93.795,124.567 ; v1(93.854,106.858) 93.901,106.905 94.212,106.905 94.978,107.671 RO1_U_AND_GATE_44.2@95.028,107.671 ; Y_RD1_U_AND_GATE_44.1@96.17,98.654 96.186,98.638 v1(96.186,97.384) ; v1(97.394,82.842) 97.902,82.334 98.41,82.334 ; v1(97.936,122.041) 98.003,122.041 98.301,121.743 R1_U_AND_GATE_45.2@99.318,121.743 ; AIN_RD3_U_NOT_GATE_53.1@98.298,81.476 98.41,81.588 98.41,82.334 ; v1(98.664,86.815) RO3_U_NOT_GATE_53.2@98.664,87.922 ; Y_RD3_U_NOT_GATE_53.1@100.046,81.638 100.046,81.688 99.748,81.986 99.698,81.986 99.35,82.334 98.41,82.334 ; v1(101.858,122.469) 101.905,122.516 102.216,122.516 102.982,123.282 RO1_U_AND_GATE_45.2@103.032,123.282 ; v1(103.124,93.239) 103.632,92.731 104.14,92.731 ; v1(103.236,103.708) 103.744,103.2 104.252,103.2 ; AIN_RD3_U_NOT_GATE_52.1@104.028,91.873 104.14,91.985 104.14,92.731 ; AIN_RD3_U_NOT_GATE_51.1@104.14,102.342 104.252,102.454 104.252,103.2 ; Y_RD1_U_AND_GATE_45.1@104.174,114.265 104.19,114.249 v1(104.19,112.995) ; v1(104.394,97.212) RO3_U_NOT_GATE_52.2@104.394,98.319 ; v1(104.506,107.681) RO3_U_NOT_GATE_51.2@104.506,108.788 ; Y_RD3_U_NOT_GATE_52.1@105.776,92.035 105.776,92.085 105.478,92.383 105.428,92.383 105.08,92.731 104.14,92.731 ; Y_RD3_U_NOT_GATE_51.1@105.888,102.504 105.888,102.554 105.59,102.852 105.54,102.852 105.192,103.2 104.252,103.2 ; v1(108.966,82.804) 109.474,82.296 109.982,82.296 ; AIN_RD3_U_NOT_GATE_54.1@109.87,81.438 109.982,81.55 109.982,82.296 ; v1(110.236,86.777) RO3_U_NOT_GATE_54.2@110.236,87.884 ; v1(111.11,114.3) 111.618,113.792 112.126,113.792 ; Y_RD3_U_NOT_GATE_54.1@111.618,81.6 111.618,81.65 111.32,81.948 111.27,81.948 110.922,82.296 109.982,82.296 ; AIN_RD3_U_NOT_GATE_50.1@112.014,112.934 112.126,113.046 112.126,113.792 ; v1(112.38,118.273) RO3_U_NOT_GATE_50.2@112.38,119.38 ; Y_RD3_U_NOT_GATE_50.1@113.762,113.096 113.762,113.146 113.464,113.444 113.414,113.444 113.066,113.792 112.126,113.792 ; v1(114.808,93.218) 115.316,92.71 115.824,92.71 ; v1(114.808,103.693) 115.316,103.185 115.824,103.185 ; AIN_RD3_U_NOT_GATE_55.1@115.712,91.852 115.824,91.964 115.824,92.71 ; AIN_RD3_U_NOT_GATE_56.1@115.712,102.327 115.824,102.439 115.824,103.185 ; v1(116.078,97.191) RO3_U_NOT_GATE_55.2@116.078,98.298 ; v1(116.078,107.666) RO3_U_NOT_GATE_56.2@116.078,108.773 ; Y_RD3_U_NOT_GATE_55.1@117.46,92.014 117.46,92.064 117.162,92.362 117.112,92.362 116.764,92.71 115.824,92.71 ; Y_RD3_U_NOT_GATE_56.1@117.46,102.489 117.46,102.539 117.162,102.837 117.112,102.837 116.764,103.185 115.824,103.185
GND: AIN_Q1_U_AND_GATE_42.2 AIN_Q1_U_AND_GATE_43.2 AIN_Q1_U_AND_GATE_44.2 AIN_Q1_U_AND_GATE_45.2 AIN_Q2_U_OR_GATE_22.2 AIN_Q2_U_OR_GATE_30.2 AIN_Q2_U_OR_GATE_31.2 AIN_Q2_U_OR_GATE_32.2 AIN_Q2_U_OR_GATE_41.2 AIN_Q3_U_NOT_GATE_01.2 AIN_Q3_U_NOT_GATE_50.2 AIN_Q3_U_NOT_GATE_51.2 AIN_Q3_U_NOT_GATE_52.2 AIN_Q3_U_NOT_GATE_53.2 AIN_Q3_U_NOT_GATE_54.2 AIN_Q3_U_NOT_GATE_55.2 AIN_Q3_U_NOT_GATE_56.2 AIN_Q4_U_XOR_GATE_00.2 AIN_Q4_U_XOR_GATE_20.2 AIN_Q4_U_XOR_GATE_21.2 AIN_Q5_U_NAND_GATE_10.2 AIN_Q5_U_NAND_GATE_40.2 BIN_Q1_U_AND_GATE_42.2 BIN_Q1_U_AND_GATE_43.2 BIN_Q1_U_AND_GATE_44.2 BIN_Q1_U_AND_GATE_45.2 BIN_Q2_U_OR_GATE_22.2 BIN_Q2_U_OR_GATE_30.2 BIN_Q2_U_OR_GATE_31.2 BIN_Q2_U_OR_GATE_32.2 BIN_Q2_U_OR_GATE_41.2 BIN_Q3_U_XOR_GATE_00.2 BIN_Q3_U_XOR_GATE_20.2 BIN_Q3_U_XOR_GATE_21.2 BIN_Q4_U_NAND_GATE_10.2 BIN_Q4_U_NAND_GATE_40.2 IN1.8 IN1.9 OUT1.9 Q2_U_AND_GATE_42.2 Q2_U_AND_GATE_43.2 Q2_U_AND_GATE_44.2 Q2_U_AND_GATE_45.2 Q3_U_AND_GATE_42.2 Q3_U_AND_GATE_43.2 Q3_U_AND_GATE_44.2 Q3_U_AND_GATE_45.2 Q4_U_OR_GATE_22.2 Q4_U_OR_GATE_30.2 Q4_U_OR_GATE_31.2 Q4_U_OR_GATE_32.2 Q4_U_OR_GATE_41.2 Q5_U_OR_GATE_22.2 Q5_U_OR_GATE_30.2 Q5_U_OR_GATE_31.2 Q5_U_OR_GATE_32.2 Q5_U_OR_GATE_41.2 Q6_U_OR_GATE_22.2 Q6_U_OR_GATE_30.2 Q6_U_OR_GATE_31.2 Q6_U_OR_GATE_32.2 Q6_U_OR_GATE_41.2 Q7_U_NOT_GATE_01.2 Q7_U_NOT_GATE_50.2 Q7_U_NOT_GATE_51.2 Q7_U_NOT_GATE_52.2 Q7_U_NOT_GATE_53.2 Q7_U_NOT_GATE_54.2 Q7_U_NOT_GATE_55.2 Q7_U_NOT_GATE_56.2 Q10_U_XOR_GATE_00.2 Q10_U_XOR_GATE_20.2 Q10_U_XOR_GATE_21.2 Q11_U_XOR_GATE_00.2 Q11_U_XOR_GATE_20.2 Q11_U_XOR_GATE_21.2 Q12_U_XOR_GATE_00.2 Q12_U_XOR_GATE_20.2 Q12_U_XOR_GATE_21.2 Q14_U_NAND_GATE_10.2 Q14_U_NAND_GATE_40.2 Y_Q1_U_AND_GATE_42.2 Y_Q1_U_AND_GATE_43.2 Y_Q1_U_AND_GATE_44.2 Y_Q1_U_AND_GATE_45.2 Y_Q2_U_OR_GATE_22.2 Y_Q2_U_OR_GATE_30.2 Y_Q2_U_OR_GATE_31.2 Y_Q2_U_OR_GATE_32.2 Y_Q2_U_OR_GATE_41.2 Y_Q3_U_NOT_GATE_01.2 Y_Q3_U_NOT_GATE_50.2 Y_Q3_U_NOT_GATE_51.2 Y_Q3_U_NOT_GATE_52.2 Y_Q3_U_NOT_GATE_53.2 Y_Q3_U_NOT_GATE_54.2 Y_Q3_U_NOT_GATE_55.2 Y_Q3_U_NOT_GATE_56.2 Y_Q4_U_XOR_GATE_00.2 Y_Q4_U_XOR_GATE_20.2 Y_Q4_U_XOR_GATE_21.2 Y_Q5_U_NAND_GATE_10.2 Y_Q5_U_NAND_GATE_40.2 | length 110.4
  Top Layer w0.254: BIN_Q1_U_AND_GATE_43.2@26.244,89.123 v1(27.359,89.123) ; AIN_Q1_U_AND_GATE_43.2@26.244,96.616 v1(27.359,96.616) ; Q7_U_NOT_GATE_01.2@29.399,108.396 v1(29.399,107.285) 29.399,106.272 AIN_Q3_U_NOT_GATE_01.2@29.515,106.156 ; BIN_Q3_U_XOR_GATE_00.2@29.643,114.672 v1(30.704,114.672) ; AIN_Q4_U_XOR_GATE_00.2@29.643,121.022 v1(30.704,121.022) ; v1(29.942,87.152) Q3_U_AND_GATE_43.2@29.942,88.331 ; Q2_U_AND_GATE_43.2@32.004,97.963 v1(32.004,99.029) ; Y_Q3_U_NOT_GATE_01.2@33.135,104.46 v1(34.29,104.46) ; Y_Q1_U_AND_GATE_43.2@33.61,92.044 v1(34.864,92.044) ; Q10_U_XOR_GATE_00.2@35.038,116.973 35.114,117.049 v1(36.038,117.049) ; Q12_U_XOR_GATE_00.2@35.21,112.859 v1(35.21,113.859) ; BIN_Q2_U_OR_GATE_41.2@39.72,82.842 v1(40.755,82.842) ; AIN_Q2_U_OR_GATE_41.2@39.72,90.537 v1(40.755,90.537) ; v1(40.102,114.037) 40.149,113.99 40.149,113.812 40.798,113.163 Q11_U_XOR_GATE_00.2@40.798,113.113 ; v1(41.017,123.511) 41.017,122.546 Y_Q4_U_XOR_GATE_00.2@41.052,122.511 ; BIN_Q4_U_NAND_GATE_10.2@41.678,99.029 v1(42.793,99.029) ; AIN_Q5_U_NAND_GATE_10.2@41.678,106.776 v1(42.793,106.776) ; v1(42.418,86.275) 42.485,86.275 42.654,86.106 43.177,86.106 Q5_U_OR_GATE_41.2@43.45,85.833 ; v1(43.434,80.687) 43.434,81.756 Q6_U_OR_GATE_41.2@43.447,81.769 ; Q4_U_OR_GATE_41.2@45.288,91.782 v1(45.288,92.879) ; v1(47.118,81.007) Y_Q2_U_OR_GATE_41.2@47.118,82.023 ; Y_Q5_U_NAND_GATE_10.2@47.299,98.583 v1(47.299,99.598) ; Q14_U_NAND_GATE_10.2@47.299,102.139 47.299,102.189 47.705,102.595 47.705,102.823 v1(47.752,102.87) ; BIN_Q3_U_XOR_GATE_20.2@49.245,114.727 v1(50.306,114.727) ; AIN_Q4_U_XOR_GATE_20.2@49.245,121.077 v1(50.306,121.077) ; BIN_Q2_U_OR_GATE_22.2@53.546,84.385 v1(54.581,84.385) ; AIN_Q2_U_OR_GATE_22.2@53.546,92.08 v1(54.581,92.08) ; BIN_Q3_U_XOR_GATE_21.2@53.803,100.188 v1(54.864,100.188) ; AIN_Q4_U_XOR_GATE_21.2@53.803,106.538 v1(54.864,106.538) ; Q10_U_XOR_GATE_20.2@54.64,117.028 54.716,117.104 v1(55.64,117.104) ; Q12_U_XOR_GATE_20.2@54.812,112.914 v1(54.812,113.914) ; v1(56.244,87.818) 56.311,87.818 56.48,87.649 57.003,87.649 Q5_U_OR_GATE_22.2@57.276,87.376 ; v1(57.26,82.23) 57.26,83.299 Q6_U_OR_GATE_22.2@57.273,83.312 ; Q4_U_OR_GATE_22.2@59.114,93.325 v1(59.114,94.422) ; Q10_U_XOR_GATE_21.2@59.198,102.489 59.274,102.565 v1(60.198,102.565) ; Q12_U_XOR_GATE_21.2@59.37,98.375 v1(59.37,99.375) ; v1(59.704,114.092) 59.751,114.045 59.751,113.867 60.4,113.218 Q11_U_XOR_GATE_20.2@60.4,113.168 ; v1(60.619,123.566) 60.619,122.601 Y_Q4_U_XOR_GATE_20.2@60.654,122.566 ; v1(60.944,82.55) Y_Q2_U_OR_GATE_22.2@60.944,83.566 ; v1(64.685,99.69) 64.685,98.902 Q11_U_XOR_GATE_21.2@64.958,98.629 ; v1(65.177,109.027) 65.177,108.062 Y_Q4_U_XOR_GATE_21.2@65.212,108.027 ; BIN_Q2_U_OR_GATE_32.2@67.574,83.115 v1(68.609,83.115) ; AIN_Q2_U_OR_GATE_32.2@67.574,90.81 v1(68.609,90.81) ; BIN_Q2_U_OR_GATE_30.2@68.93,114.677 v1(69.965,114.677) ; AIN_Q2_U_OR_GATE_30.2@68.93,122.372 v1(69.965,122.372) ; v1(70.272,86.548) 70.339,86.548 70.508,86.379 71.031,86.379 Q5_U_OR_GATE_32.2@71.304,86.106 ; v1(71.288,80.96) 71.288,82.029 Q6_U_OR_GATE_32.2@71.301,82.042 ; v1(71.628,118.11) 71.695,118.11 71.864,117.941 72.387,117.941 Q5_U_OR_GATE_30.2@72.66,117.668 ; v1(72.644,112.522) 72.644,113.591 Q6_U_OR_GATE_30.2@72.657,113.604 ; Q4_U_OR_GATE_32.2@73.142,92.055 v1(73.142,93.152) ; BIN_Q2_U_OR_GATE_31.2@73.374,98.863 v1(74.409,98.863) ; AIN_Q2_U_OR_GATE_31.2@73.374,106.558 v1(74.409,106.558) ; Q4_U_OR_GATE_30.2@74.498,123.617 v1(74.498,124.714) ; v1(74.972,81.28) Y_Q2_U_OR_GATE_32.2@74.972,82.296 ; v1(76.072,102.296) 76.139,102.296 76.308,102.127 76.831,102.127 Q5_U_OR_GATE_31.2@77.104,101.854 ; v1(76.328,112.842) Y_Q2_U_OR_GATE_30.2@76.328,113.858 ; v1(77.088,96.708) 77.088,97.777 Q6_U_OR_GATE_31.2@77.101,97.79 ; Q4_U_OR_GATE_31.2@78.942,107.803 v1(78.942,108.9) ; v1(80.772,97.028) Y_Q2_U_OR_GATE_31.2@80.772,98.044 ; BIN_Q1_U_AND_GATE_42.2@81.692,83.362 v1(82.807,83.362) ; AIN_Q1_U_AND_GATE_42.2@81.692,90.855 v1(82.807,90.855) ; BIN_Q4_U_NAND_GATE_40.2@83.213,114.987 v1(84.328,114.987) ; AIN_Q5_U_NAND_GATE_40.2@83.213,122.734 v1(84.328,122.734) ; v1(85.39,81.391) Q3_U_AND_GATE_42.2@85.39,82.57 ; BIN_Q1_U_AND_GATE_44.2@87.408,99.116 v1(88.523,99.116) ; AIN_Q1_U_AND_GATE_44.2@87.408,106.609 v1(88.523,106.609) ; Q2_U_AND_GATE_42.2@87.452,92.202 v1(87.452,93.268) ; Y_Q5_U_NAND_GATE_40.2@88.834,114.541 v1(88.834,115.556) ; Q14_U_NAND_GATE_40.2@88.834,118.097 88.9,118.163 v1(88.9,119.112) ; Y_Q1_U_AND_GATE_42.2@89.058,86.283 v1(90.312,86.283) ; v1(91.106,97.145) Q3_U_AND_GATE_44.2@91.106,98.324 ; Q2_U_AND_GATE_44.2@93.168,107.956 v1(93.168,109.022) ; Y_Q1_U_AND_GATE_44.2@94.774,102.037 v1(96.028,102.037) ; Q7_U_NOT_GATE_53.2@95.043,87.352 v1(95.043,86.241) 95.043,85.228 AIN_Q3_U_NOT_GATE_53.2@95.159,85.112 ; BIN_Q1_U_AND_GATE_45.2@95.412,114.727 v1(96.527,114.727) ; AIN_Q1_U_AND_GATE_45.2@95.412,122.22 v1(96.527,122.22) ; Y_Q3_U_NOT_GATE_53.2@98.779,83.416 v1(99.934,83.416) ; v1(99.11,112.756) Q3_U_AND_GATE_45.2@99.11,113.935 ; Q7_U_NOT_GATE_52.2@100.773,97.749 v1(100.773,96.638) 100.773,95.625 AIN_Q3_U_NOT_GATE_52.2@100.889,95.509 ; Q7_U_NOT_GATE_51.2@100.885,108.218 v1(100.885,107.107) 100.885,106.094 AIN_Q3_U_NOT_GATE_51.2@101.001,105.978 ; Q2_U_AND_GATE_45.2@101.172,123.567 v1(101.172,124.633) ; Y_Q1_U_AND_GATE_45.2@102.778,117.648 v1(104.032,117.648) ; Y_Q3_U_NOT_GATE_52.2@104.509,93.813 v1(105.664,93.813) ; Y_Q3_U_NOT_GATE_51.2@104.621,104.282 v1(105.776,104.282) ; Q7_U_NOT_GATE_54.2@106.615,87.314 v1(106.615,86.203) 106.615,85.19 AIN_Q3_U_NOT_GATE_54.2@106.731,85.074 ; Q7_U_NOT_GATE_50.2@108.759,118.81 v1(108.759,117.699) 108.759,116.686 AIN_Q3_U_NOT_GATE_50.2@108.875,116.57 ; Y_Q3_U_NOT_GATE_54.2@110.351,83.378 v1(111.506,83.378) ; Q7_U_NOT_GATE_55.2@112.457,97.728 v1(112.457,96.617) 112.457,95.604 AIN_Q3_U_NOT_GATE_55.2@112.573,95.488 ; Q7_U_NOT_GATE_56.2@112.457,108.203 v1(112.457,107.092) 112.457,106.079 AIN_Q3_U_NOT_GATE_56.2@112.573,105.963 ; Y_Q3_U_NOT_GATE_50.2@112.495,114.874 v1(113.65,114.874) ; Y_Q3_U_NOT_GATE_55.2@116.193,93.792 v1(117.348,93.792) ; Y_Q3_U_NOT_GATE_56.2@116.193,104.267 v1(117.348,104.267)
IN1_5: BIN_R2_U_OR_GATE_41.2 BIN_R3_U_XOR_GATE_20.2 IN1.7 R13_U_OR_GATE_41.1 R22_U_XOR_GATE_20.1 | length 71.9
  Top Layer w0.254: IN1.7@20.32,96.52 v1(22.606,96.52) ; v1(34.544,93.055) 34.544,93.122 34.779,93.357 34.779,93.552 36.115,94.888 37.733,94.888 38.249,95.404 38.249,98.344 37.467,99.126 v1(37.467,101.533) ; v1(35.702,85.598) 38.043,85.598 BIN_R2_U_OR_GATE_41.2@38.1,85.655 38.15,85.655 38.864,86.369 39.422,86.369 39.72,86.667 R13_U_OR_GATE_41.1@39.72,86.717 39.72,86.767 39.422,87.065 39.372,87.065 38.977,87.46 v1(37.292,87.46) ; v1(45.466,116.84) 47.248,116.84 BIN_R3_U_XOR_GATE_20.2@47.512,117.104 47.562,117.104 48.385,117.927 52.785,117.927 R22_U_XOR_GATE_20.1@52.846,117.866
  Bottom Layer w0.254: v1(22.606,96.52) 33.528,85.598 v1(35.702,85.598) ; v1(34.544,93.055) 34.233,92.744 34.233,90.519 v1(37.292,87.46) ; v1(37.467,101.533) 42.162,106.228 42.162,109.915 45.466,113.219 v1(45.466,116.84)
IN2_5: AIN_R3_U_NOT_GATE_01.2 BIN_R3_U_XOR_GATE_00.2 IN1.6 R14_U_NOT_GATE_01.1 R22_U_XOR_GATE_00.1 | length 32
  Top Layer w0.254: IN1.6@20.32,99.06 22.291,99.06 22.606,99.375 22.606,100.433 24.677,102.504 24.677,104.614 25.981,105.918 AIN_R3_U_NOT_GATE_01.2@27.81,105.918 R14_U_NOT_GATE_01.1@27.81,108.966 26.719,108.966 25.908,109.777 25.908,116.259 26.698,117.049 BIN_R3_U_XOR_GATE_00.2@27.91,117.049 27.96,117.049 28.783,117.872 33.183,117.872 R22_U_XOR_GATE_00.1@33.244,117.811
IN3_5: AIN_R2_U_OR_GATE_22.2 AIN_R2_U_OR_GATE_31.2 AIN_R4_U_XOR_GATE_21.2 AIN_R5_U_NAND_GATE_10.2 BIN_R4_U_NAND_GATE_40.2 IN1.5 R11_U_OR_GATE_22.1 R11_U_OR_GATE_31.1 R21_U_XOR_GATE_21.1 R23_U_NAND_GATE_10.1 R24_U_NAND_GATE_40.1 | length 116.7
  Top Layer w0.254: IN1.5@20.32,101.6 22.048,101.6 v1(22.86,102.412) ; v1(38.043,108.203) 38.043,107.158 39.045,106.156 AIN_R5_U_NAND_GATE_10.2@40.02,106.156 40.07,106.156 40.946,105.28 41.591,105.28 41.889,104.982 R23_U_NAND_GATE_10.1@41.889,104.932 41.889,104.882 42.383,104.388 42.383,104.299 42.777,103.905 44.674,103.905 45.425,103.154 46.482,103.154 46.636,103.308 46.907,103.308 48.076,104.477 48.076,105.206 v1(49.245,106.375) ; v1(49.53,97.314) 47.986,95.77 47.809,95.77 46.069,94.031 46.069,91.355 46.487,90.937 48.162,90.937 48.588,90.511 48.588,90.332 49.015,89.906 51.189,89.906 51.578,90.295 51.578,90.934 51.876,91.232 AIN_R2_U_OR_GATE_22.2@51.926,91.232 51.976,91.232 52.695,90.513 53.248,90.513 53.546,90.215 R11_U_OR_GATE_22.1@53.546,90.165 ; v1(52.02,104.46) 52.02,105.787 AIN_R4_U_XOR_GATE_21.2@52.07,105.837 52.12,105.837 53.248,104.709 R21_U_XOR_GATE_21.1@54.214,104.709 54.214,104.659 54.708,104.165 54.708,104.076 54.931,103.853 56.344,103.853 56.624,104.133 58.065,104.133 58.717,103.481 59.841,103.481 v1(59.944,103.378) ; v1(65.278,103.632) 65.756,103.154 v1(66.723,103.154) ; v1(67.872,103.834) 69.828,103.834 71.704,105.71 AIN_R2_U_OR_GATE_31.2@71.754,105.71 71.804,105.71 72.523,104.991 73.076,104.991 73.374,104.693 R11_U_OR_GATE_31.1@73.374,104.643 73.374,104.593 73.076,104.295 73.026,104.295 72.709,103.978 v1(71.882,103.978) ; v1(80.764,119.126) 81.555,118.335 BIN_R4_U_NAND_GATE_40.2@81.555,117.491 81.605,117.491 82.373,118.259 83.126,118.259 83.424,118.557 R24_U_NAND_GATE_40.1@83.424,118.607
  Bottom Layer w0.254: v1(22.86,102.412) 25.302,104.854 32.627,104.854 35.976,108.203 v1(38.043,108.203) ; v1(49.245,106.375) 51.16,104.46 v1(52.02,104.46) 49.53,101.97 v1(49.53,97.314) ; v1(59.944,103.378) 65.129,103.378 65.129,103.417 65.278,103.565 v1(65.278,103.632) ; v1(66.723,103.154) 67.455,103.886 67.818,103.886 67.87,103.834 v1(67.872,103.834) ; v1(71.882,103.978) 72.983,105.079 72.983,106.805 78.609,112.432 78.609,118.233 79.502,119.126 v1(80.764,119.126)
IN4_5: AIN_R4_U_XOR_GATE_00.2 IN1.4 R21_U_XOR_GATE_00.1 | length 23.4
  Top Layer w0.254: IN1.4@20.32,104.14 22.751,104.14 24.13,105.519 24.13,116.591 27.86,120.321 AIN_R4_U_XOR_GATE_00.2@27.91,120.321 27.96,120.321 29.088,119.193 R21_U_XOR_GATE_00.1@30.054,119.193
NetAIN_D1_U_AND_GATE_42_1: AIN_D1_U_AND_GATE_42.1 AIN_RD1_U_AND_GATE_42.2 | length 1.9
  Top Layer w0.254: AIN_RD1_U_AND_GATE_42.2@80.075,94.502 81.912,94.502 AIN_D1_U_AND_GATE_42.1@81.942,94.472
NetAIN_D1_U_AND_GATE_42_2: AIN_D1_U_AND_GATE_42.2 AIN_Q1_U_AND_GATE_42.3 | length 2.8
  Top Layer w0.254: AIN_D1_U_AND_GATE_42.2@83.442,94.472 83.692,94.222 AIN_Q1_U_AND_GATE_42.3@83.692,91.805
NetAIN_D1_U_AND_GATE_43_1: AIN_D1_U_AND_GATE_43.1 AIN_RD1_U_AND_GATE_43.2 | length 1.9
  Top Layer w0.254: AIN_RD1_U_AND_GATE_43.2@24.627,100.263 26.464,100.263 AIN_D1_U_AND_GATE_43.1@26.494,100.233
NetAIN_D1_U_AND_GATE_43_2: AIN_D1_U_AND_GATE_43.2 AIN_Q1_U_AND_GATE_43.3 | length 2.8
  Top Layer w0.254: AIN_D1_U_AND_GATE_43.2@27.994,100.233 28.244,99.983 AIN_Q1_U_AND_GATE_43.3@28.244,97.566
NetAIN_D1_U_AND_GATE_44_1: AIN_D1_U_AND_GATE_44.1 AIN_RD1_U_AND_GATE_44.2 | length 1.9
  Top Layer w0.254: AIN_RD1_U_AND_GATE_44.2@85.791,110.256 87.628,110.256 AIN_D1_U_AND_GATE_44.1@87.658,110.226
NetAIN_D1_U_AND_GATE_44_2: AIN_D1_U_AND_GATE_44.2 AIN_Q1_U_AND_GATE_44.3 | length 2.8
  Top Layer w0.254: AIN_D1_U_AND_GATE_44.2@89.158,110.226 89.408,109.976 AIN_Q1_U_AND_GATE_44.3@89.408,107.559
NetAIN_D1_U_AND_GATE_45_1: AIN_D1_U_AND_GATE_45.1 AIN_RD1_U_AND_GATE_45.2 | length 1.9
  Top Layer w0.254: AIN_RD1_U_AND_GATE_45.2@93.795,125.867 95.632,125.867 AIN_D1_U_AND_GATE_45.1@95.662,125.837
NetAIN_D1_U_AND_GATE_45_2: AIN_D1_U_AND_GATE_45.2 AIN_Q1_U_AND_GATE_45.3 | length 2.8
  Top Layer w0.254: AIN_D1_U_AND_GATE_45.2@97.162,125.837 97.412,125.587 AIN_Q1_U_AND_GATE_45.3@97.412,123.17
NetAIN_D2_U_OR_GATE_22_1: AIN_D2_U_OR_GATE_22.1 AIN_RD2_U_OR_GATE_22.2 | length 2
  Top Layer w0.254: AIN_RD2_U_OR_GATE_22.2@51.926,95.625 53.844,95.625 AIN_D2_U_OR_GATE_22.1@53.911,95.692
NetAIN_D2_U_OR_GATE_22_2: AIN_D2_U_OR_GATE_22.2 AIN_Q2_U_OR_GATE_22.3 | length 2.7
  Top Layer w0.254: AIN_D2_U_OR_GATE_22.2@55.411,95.692 55.411,93.165 AIN_Q2_U_OR_GATE_22.3@55.546,93.03
NetAIN_D2_U_OR_GATE_30_1: AIN_D2_U_OR_GATE_30.1 AIN_RD2_U_OR_GATE_30.2 | length 2
  Top Layer w0.254: AIN_RD2_U_OR_GATE_30.2@67.31,125.917 69.228,125.917 AIN_D2_U_OR_GATE_30.1@69.295,125.984
NetAIN_D2_U_OR_GATE_30_2: AIN_D2_U_OR_GATE_30.2 AIN_Q2_U_OR_GATE_30.3 | length 2.7
  Top Layer w0.254: AIN_D2_U_OR_GATE_30.2@70.795,125.984 70.795,123.457 AIN_Q2_U_OR_GATE_30.3@70.93,123.322
NetAIN_D2_U_OR_GATE_31_1: AIN_D2_U_OR_GATE_31.1 AIN_RD2_U_OR_GATE_31.2 | length 2
  Top Layer w0.254: AIN_RD2_U_OR_GATE_31.2@71.754,110.103 73.672,110.103 AIN_D2_U_OR_GATE_31.1@73.739,110.17
NetAIN_D2_U_OR_GATE_31_2: AIN_D2_U_OR_GATE_31.2 AIN_Q2_U_OR_GATE_31.3 | length 2.7
  Top Layer w0.254: AIN_D2_U_OR_GATE_31.2@75.239,110.17 75.239,107.643 AIN_Q2_U_OR_GATE_31.3@75.374,107.508
NetAIN_D2_U_OR_GATE_32_1: AIN_D2_U_OR_GATE_32.1 AIN_RD2_U_OR_GATE_32.2 | length 2
  Top Layer w0.254: AIN_RD2_U_OR_GATE_32.2@65.954,94.355 67.872,94.355 AIN_D2_U_OR_GATE_32.1@67.939,94.422
NetAIN_D2_U_OR_GATE_32_2: AIN_D2_U_OR_GATE_32.2 AIN_Q2_U_OR_GATE_32.3 | length 2.7
  Top Layer w0.254: AIN_D2_U_OR_GATE_32.2@69.439,94.422 69.439,91.895 AIN_Q2_U_OR_GATE_32.3@69.574,91.76
NetAIN_D2_U_OR_GATE_41_1: AIN_D2_U_OR_GATE_41.1 AIN_RD2_U_OR_GATE_41.2 | length 2
  Top Layer w0.254: AIN_RD2_U_OR_GATE_41.2@38.1,94.082 40.018,94.082 AIN_D2_U_OR_GATE_41.1@40.085,94.149
NetAIN_D2_U_OR_GATE_41_2: AIN_D2_U_OR_GATE_41.2 AIN_Q2_U_OR_GATE_41.3 | length 2.7
  Top Layer w0.254: AIN_D2_U_OR_GATE_41.2@41.585,94.149 41.585,91.622 AIN_Q2_U_OR_GATE_41.3@41.72,91.487
NetAIN_D3_U_NOT_GATE_01_1: AIN_D3_U_NOT_GATE_01.1 AIN_RD3_U_NOT_GATE_01.2 | length 1.9
  Top Layer w0.254: AIN_D3_U_NOT_GATE_01.1@29.452,102.52 AIN_RD3_U_NOT_GATE_01.2@31.354,102.52
NetAIN_D3_U_NOT_GATE_01_2: AIN_D3_U_NOT_GATE_01.2 AIN_Q3_U_NOT_GATE_01.3 | length 3.2
  Top Layer w0.254: AIN_D3_U_NOT_GATE_01.2@27.952,102.52 29.265,103.833 30.192,103.833 30.465,104.106 AIN_Q3_U_NOT_GATE_01.3@30.465,104.156
NetAIN_D3_U_NOT_GATE_50_1: AIN_D3_U_NOT_GATE_50.1 AIN_RD3_U_NOT_GATE_50.2 | length 1.9
  Top Layer w0.254: AIN_D3_U_NOT_GATE_50.1@108.812,112.934 AIN_RD3_U_NOT_GATE_50.2@110.714,112.934
NetAIN_D3_U_NOT_GATE_50_2: AIN_D3_U_NOT_GATE_50.2 AIN_Q3_U_NOT_GATE_50.3 | length 3.2
  Top Layer w0.254: AIN_D3_U_NOT_GATE_50.2@107.312,112.934 108.625,114.247 109.552,114.247 109.825,114.52 AIN_Q3_U_NOT_GATE_50.3@109.825,114.57
NetAIN_D3_U_NOT_GATE_51_1: AIN_D3_U_NOT_GATE_51.1 AIN_RD3_U_NOT_GATE_51.2 | length 1.9
  Top Layer w0.254: AIN_D3_U_NOT_GATE_51.1@100.938,102.342 AIN_RD3_U_NOT_GATE_51.2@102.84,102.342
NetAIN_D3_U_NOT_GATE_51_2: AIN_D3_U_NOT_GATE_51.2 AIN_Q3_U_NOT_GATE_51.3 | length 3.2
  Top Layer w0.254: AIN_D3_U_NOT_GATE_51.2@99.438,102.342 100.751,103.655 101.678,103.655 101.951,103.928 AIN_Q3_U_NOT_GATE_51.3@101.951,103.978
NetAIN_D3_U_NOT_GATE_52_1: AIN_D3_U_NOT_GATE_52.1 AIN_RD3_U_NOT_GATE_52.2 | length 1.9
  Top Layer w0.254: AIN_D3_U_NOT_GATE_52.1@100.826,91.873 AIN_RD3_U_NOT_GATE_52.2@102.728,91.873
NetAIN_D3_U_NOT_GATE_52_2: AIN_D3_U_NOT_GATE_52.2 AIN_Q3_U_NOT_GATE_52.3 | length 3.2
  Top Layer w0.254: AIN_D3_U_NOT_GATE_52.2@99.326,91.873 100.639,93.186 101.566,93.186 101.839,93.459 AIN_Q3_U_NOT_GATE_52.3@101.839,93.509
NetAIN_D3_U_NOT_GATE_53_1: AIN_D3_U_NOT_GATE_53.1 AIN_RD3_U_NOT_GATE_53.2 | length 1.9
  Top Layer w0.254: AIN_D3_U_NOT_GATE_53.1@95.096,81.476 AIN_RD3_U_NOT_GATE_53.2@96.998,81.476
NetAIN_D3_U_NOT_GATE_53_2: AIN_D3_U_NOT_GATE_53.2 AIN_Q3_U_NOT_GATE_53.3 | length 3.2
  Top Layer w0.254: AIN_D3_U_NOT_GATE_53.2@93.596,81.476 94.909,82.789 95.836,82.789 96.109,83.062 AIN_Q3_U_NOT_GATE_53.3@96.109,83.112
NetAIN_D3_U_NOT_GATE_54_1: AIN_D3_U_NOT_GATE_54.1 AIN_RD3_U_NOT_GATE_54.2 | length 1.9
  Top Layer w0.254: AIN_D3_U_NOT_GATE_54.1@106.668,81.438 AIN_RD3_U_NOT_GATE_54.2@108.57,81.438
NetAIN_D3_U_NOT_GATE_54_2: AIN_D3_U_NOT_GATE_54.2 AIN_Q3_U_NOT_GATE_54.3 | length 3.2
  Top Layer w0.254: AIN_D3_U_NOT_GATE_54.2@105.168,81.438 106.481,82.751 107.408,82.751 107.681,83.024 AIN_Q3_U_NOT_GATE_54.3@107.681,83.074
NetAIN_D3_U_NOT_GATE_55_1: AIN_D3_U_NOT_GATE_55.1 AIN_RD3_U_NOT_GATE_55.2 | length 1.9
  Top Layer w0.254: AIN_D3_U_NOT_GATE_55.1@112.51,91.852 AIN_RD3_U_NOT_GATE_55.2@114.412,91.852
NetAIN_D3_U_NOT_GATE_55_2: AIN_D3_U_NOT_GATE_55.2 AIN_Q3_U_NOT_GATE_55.3 | length 3.2
  Top Layer w0.254: AIN_D3_U_NOT_GATE_55.2@111.01,91.852 112.323,93.165 113.25,93.165 113.523,93.438 AIN_Q3_U_NOT_GATE_55.3@113.523,93.488
NetAIN_D3_U_NOT_GATE_56_1: AIN_D3_U_NOT_GATE_56.1 AIN_RD3_U_NOT_GATE_56.2 | length 1.9
  Top Layer w0.254: AIN_D3_U_NOT_GATE_56.1@112.51,102.327 AIN_RD3_U_NOT_GATE_56.2@114.412,102.327
NetAIN_D3_U_NOT_GATE_56_2: AIN_D3_U_NOT_GATE_56.2 AIN_Q3_U_NOT_GATE_56.3 | length 3.2
  Top Layer w0.254: AIN_D3_U_NOT_GATE_56.2@111.01,102.327 112.323,103.64 113.25,103.64 113.523,103.913 AIN_Q3_U_NOT_GATE_56.3@113.523,103.963
NetAIN_D4_U_XOR_GATE_00_1: AIN_D4_U_XOR_GATE_00.1 AIN_RD4_U_XOR_GATE_00.2 | length 1.9
  Top Layer w0.254: AIN_RD4_U_XOR_GATE_00.2@27.91,124.542 29.461,124.542 AIN_D4_U_XOR_GATE_00.1@29.7,124.781
NetAIN_D4_U_XOR_GATE_00_2: AIN_D4_U_XOR_GATE_00.2 AIN_Q4_U_XOR_GATE_00.3 | length 3
  Top Layer w0.254: AIN_D4_U_XOR_GATE_00.2@31.2,124.781 31.37,124.611 31.37,122.245 AIN_Q4_U_XOR_GATE_00.3@31.643,121.972
NetAIN_D4_U_XOR_GATE_20_1: AIN_D4_U_XOR_GATE_20.1 AIN_RD4_U_XOR_GATE_20.2 | length 1.9
  Top Layer w0.254: AIN_RD4_U_XOR_GATE_20.2@47.512,124.597 49.063,124.597 AIN_D4_U_XOR_GATE_20.1@49.302,124.836
NetAIN_D4_U_XOR_GATE_20_2: AIN_D4_U_XOR_GATE_20.2 AIN_Q4_U_XOR_GATE_20.3 | length 3
  Top Layer w0.254: AIN_D4_U_XOR_GATE_20.2@50.802,124.836 50.972,124.666 50.972,122.3 AIN_Q4_U_XOR_GATE_20.3@51.245,122.027